# Altium PCB CH340N4T-R0.PcbDoc
Units mil, origin at the board's own origin, x right, y up, seen from the top; angles counter-clockwise.
Board outline 570 x 1109 mil, 2 copper layers (Top Layer, Bottom Layer); 12 components, 11 nets, 39 pads, 49 vias.
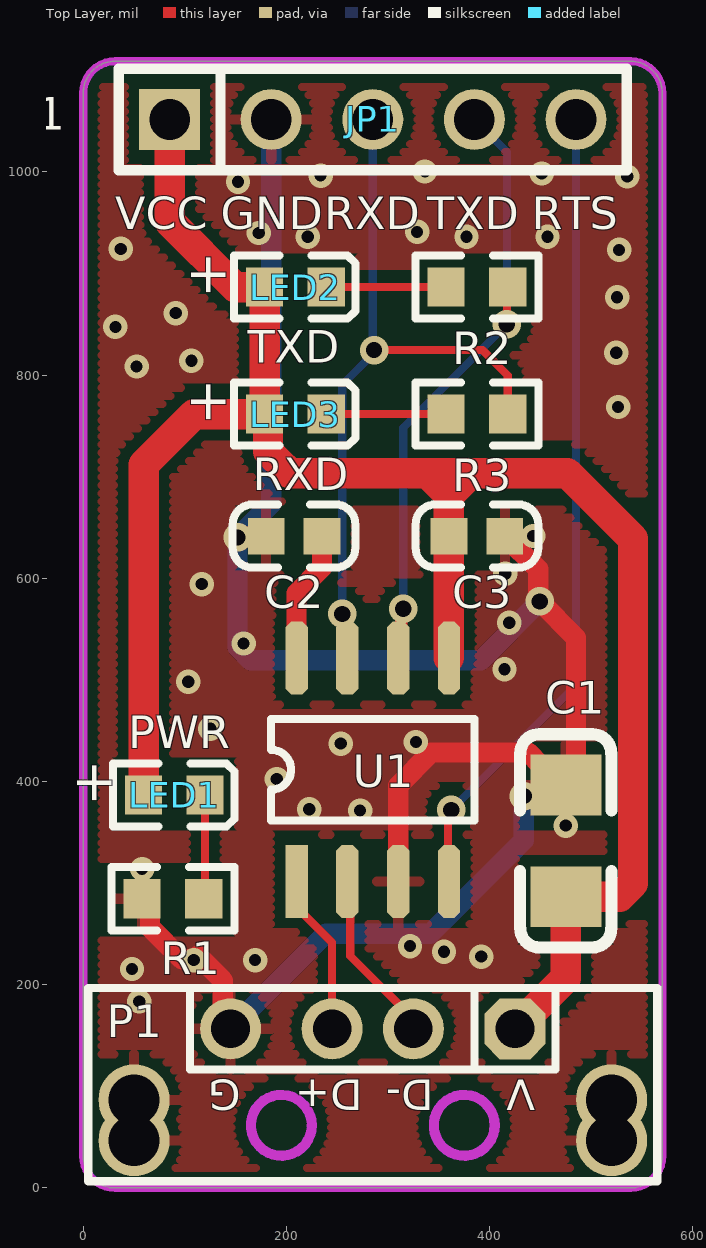
[diagram p0: Top Layer view]
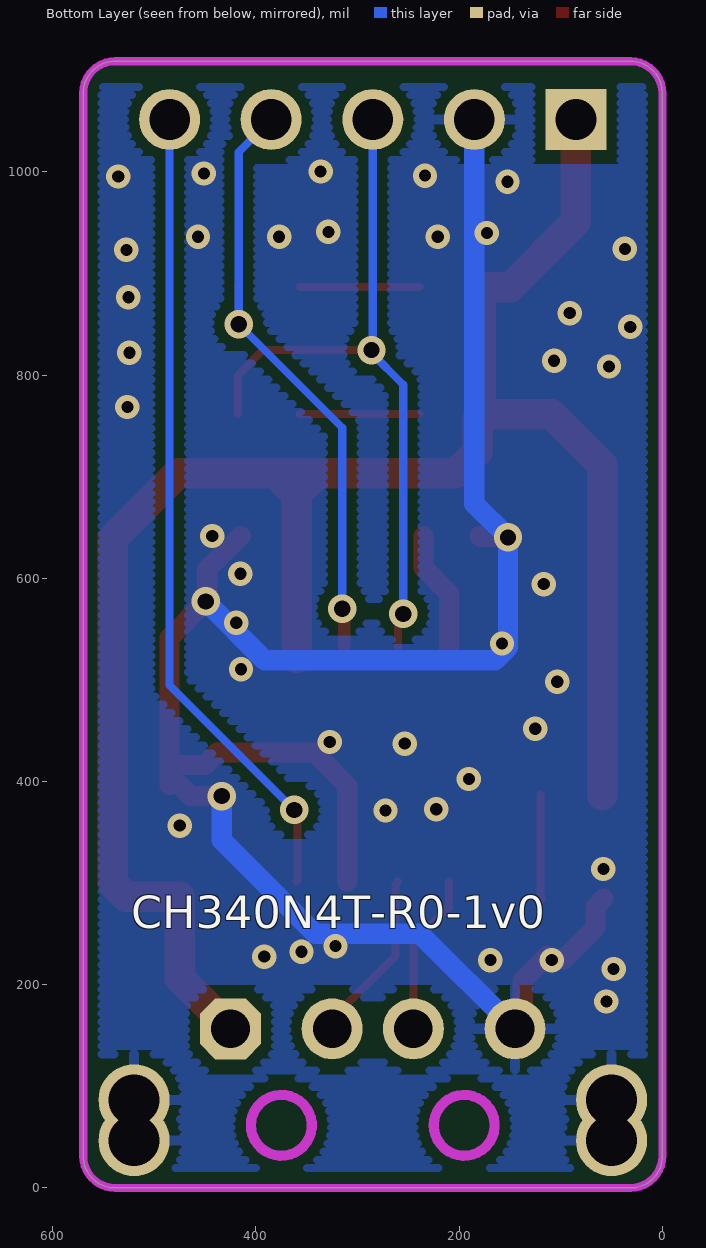
[diagram p1: Bottom Layer view, seen from below]

## Layer stack, top to bottom
Top Solder: solder mask 0.4, Solder Resist, Dk 3.5
Top Layer: signal copper 1.4
Dielectric 1: dielectric 12.6, FR-4, Dk 4.8
Bottom Layer: signal copper 1.4
Bottom Solder: solder mask 0.4, Solder Resist, Dk 3.5

## Board outline
0,31.5 ccw(c31.5,31.5) 31.5,0 538.5,0 ccw(c538.5,31.5) 570,31.5 570,1077.5 ccw(c538.5,1077.5) 538.5,1109 31.5,1109 ccw(c31.5,1077.5) 0,1077.5

## Design rules (kind name [scope] priority, off if disabled: settings)
Clearance Clearance_1 [InPolygon] p1: gap=10 ignorepadtopadclearanceinfootprint=FALSE
Clearance [All] p2: gap=6 ignorepadtopadclearanceinfootprint=FALSE
ComponentClearance [All] p1 off: gap=10 collisioncheckmode=3 verticalgap=10 showdistances=FALSE
DiffPairsRouting [All] p1: maxlimit=10 minlimit=7 mostfreqgap=8 toplayer_minwidth=6 toplayer_maxwidth=15 toplayer_prefwidth=8 bottomlayer_minwidth=6 bottomlayer_maxwidth=15 bottomlayer_prefwidth=8 maxuncoupledlength=500
MinimumSolderMaskSliver [All] p1 off: minsoldermaskwidth=10
PolygonConnect PolygonConnect_1 [IsVia] p1: connectstyle=Direct reliefconductorwidth=10 reliefentries=4 polygonreliefangle="90 Angle" airgapwidth=10
PolygonConnect [All] p2: connectstyle=Relief reliefconductorwidth=10 reliefentries=4 polygonreliefangle="90 Angle" airgapwidth=10
RoutingVias [All] p1: holewidth=16 width=28 viastyle="Through Hole" minholewidth=12 minwidth=24 maxholewidth=28 maxwidth=50
SilkToSilkClearance [All] p1 off: silktosilkclearance=10
SilkToSolderMaskClearance [IsPad] p1 off: minsilkscreentomaskgap=10 clearancetoexposedcopper=TRUE
SolderMaskExpansion [All] p1: expansion=4 istentingtop=FALSE
Width [All] p1: maxlimit=100 minlimit=6 preferedwidth=10
25 further rules are at their usual default settings.

## Classes and differential pairs
differential pair NewDifferentialPair1: +UD+ -UD-

## Components (designator, comment, footprint, x,y, rotation, side; value= is the part's Value field where it differs from the comment)
C1 "10uF" 3216_C 475,286.64 r270 top
C2 "0.1uF" 0603_C 235,641.64 r180 top
C3 "0.1uF" 0603_C 415,641.64 r180 top
JP1 "Header 5" SIP5-2.54mm 85,1051.64 r90 top
LED1 "PWR" 0603+ 59.37,386.64 r0 top
LED2 "TXD" 0603+ 178.57,886.64 r0 top
LED3 "RXD" 0603+ 178.57,761.64 r0 top
P1 "USB" USBAM 425,156.64 r180 top
R1 "2K" 0603 118.62,284.62 r180 top
R2 "2K" 0603 357.19,886.64 r0 top
R3 "2K" 0603 357.19,761.64 r0 top
U1 "CH340N" SOP8 210,301.64 r0 top

## Footprints (in the part's own frame and the unit in brackets; to place one, negate y for a bottom-side part, rotate by r counter-clockwise, add the part's x,y. Pads: shape width x height; smd on the part's side, far side on the other; paste and mask are expansions set on the pad)
0603 [mm]
  rect 0.93x0.98 smd: 1(0,0) 2(1.54,0)
  silkscreen extent -0.76,-0.79 2.3,0.79
0603+ [mm]
  rect 0.93x0.98 smd: 1(0,0) 2(1.54,0)
  silkscreen extent -0.76,-0.79 2.27,0.79
0603_C [mil]
  rect 36x36 smd: 1(0,0) 2(55,0)
  silkscreen extent -33,-31 88,31
3216_C [mil]
  rect 60x70 smd: 1(0,0) 2(-110,0)
  silkscreen extent -160,-45 50,45
SIP5-2.54mm [mil]
  rect 60x60 hole 40: 1(0,0)
  round 60 hole 40: 2(0,-100) 3(0,-200) 4(0,-300) 5(0,-400)
  silkscreen extent -50,-450 50,50
SOP8 [mil]
  rect 22x72 smd: 1(0,0)
  oct 22x72 smd: 2(50,0) 3(100,0) 4(150,0) 5(150,220) 6(100,220) 7(50,220) 8(0,220)
  silkscreen extent -25,60 175,160
USBAM [mil]
  round 70 hole 50: 0(-95,70) 0(-95,110) 0(375,70) 0(375,110)
  oct 60x60 hole 38: 1(0,0)
  round 60 hole 38: 2(100,0) 3(180,0) 4(280,0)
  Keep-Out Layer circle w10: c50,95 r30
  Keep-Out Layer circle w10: c230,95 r30
  silkscreen extent -140,-40 420,150

## Part data
C1 C2 C3: library part CAP, "Capacitor"
JP1: "Header, 5-Pin"
LED1: library part LED2, "Typical RED, GREEN, YELLOW, AMBER GaAs LED", PackageDocument=Feb-2002
LED2 LED3: library part LED2, "Typical RED, GREEN, YELLOW, AMBER GaAs LED"
R1 R2 R3: library part Res2, "Resistor"
U1: "USB to TTL Serial / UART"

## Via types
v1: diameter 24, hole 12, Top Layer to Bottom Layer, tented both sides, 41 vias
v2: diameter 28, hole 16, Top Layer to Bottom Layer, tented both sides, 8 vias

## Nets (pads, with @x,y where several pads share a name; then routed paths per layer and width w, separated by ;. In a path a pad name is that pad's centre, name@x,y a point inside that pad or via, vN(x,y) a via of type N, cw(c..) or ccw(c..) an arc to the next point about the centre after c; other vN are vias at no path point)
GND: C1.2 C2.2 C3.1 JP1.2 P1.0 P1.4 R1.2 U1.3 | length 2081.8
  Top Layer w20: R1.2 65.73,276.88 65.73,256.47 97.18,225.02 108.11,225.02 v1(108.87,224.25) ; v1@113.12,228.5 137.35,204.28 137.35,164.3 P1.4 ; v2(151.91,640.3) 152.59,640.97 179.33,640.97 C2.2 ; U1.3 310,396.06 342.57,428.64 438.01,428.64 450.39,416.25 C1.2@485,416.25 ; C3.1 447.82,608.82 447.82,578.82 v2(449.35,577.29) 485,541.64 C1.2@485,416.25 ; v2(433.63,385.72) 464.08,385.72 C1.2 ; C1.2@485,396.64 C1.2@485,416.25
  Bottom Layer w20: P1.4 238.65,250.29 341.53,250.29 433.63,342.39 v2(433.63,385.72) ; v2(151.91,640.3) 185,673.38 JP1.2 ; v2@151.91,643.99 151.91,532.26 164.65,519.52 391.58,519.52 v2(449.35,577.29)
  other v1: 55.06,183.48 47.99,215.56 169.21,224.25 391.79,227.76 355.15,232.48 321.67,238.06 57.99,313.91 475,356.64 272.5,371.57 222.49,372.66 190.41,402.56 253.47,437.35 327.4,438.98 125.18,452.02 103.44,498.23 414.68,510.56 157.84,535.92 419.34,556.25 116.63,594.38 415.34,604.61 443,641.64 526.49,768.65 52.55,808.56 106.52,814.18 524.55,822.15 31.67,847.5 91.17,861.04 525.52,876.62 527.46,923.31 36.87,924.31 220.98,936.28 377.22,936.28 456.97,936.28 172.72,939.96 328.66,941.05 152.4,990.3 535.5,995.58 233.66,996.4 451.25,998.45 336.32,1000.49
NetC2_1: C2.1 U1.8 | length 130.4
  Top Layer w20: U1.8 210,585.35 235,610.35 C2.1
NetLED1_2: LED1.2 R1.1 | length 102.6
  Top Layer w8: R1.1 120,285.99 LED1.2
NetLED2_2: LED2.2 R2.1 | length 118
  Top Layer w8: LED2.2 R2.1
NetLED3_2: LED3.2 R3.1 | length 118
  Top Layer w8: LED3.2 R3.1
RTS: JP1.5 U1.4 | length 802.4
  Top Layer w8: U1.4 359.21,302.43 359.21,369.04 v2(362.28,372.1)
  Bottom Layer w8: v2(362.28,372.1) 485,494.83 JP1.5
RXD: JP1.3 R3.2 U1.7 | length 731
  Top Layer w8: v2(255,565) v2@258.18,565 ; U1.7 v2@260,563.18 ; v2(286.25,824.73) 392.94,824.73 417.82,799.84 R3.2 ; v2@258.18,565 260,565 v2@260,563.18 ; v2@258.18,565 v2@260,563.18
  Bottom Layer w8: v2(255,565) 255,790.52 286.17,821.69 286.17,830.88 285,832.06 JP1.3
TXD: JP1.4 R2.2 U1.6 | length 677.7
  Top Layer w8: v2(416.96,850.16) 416.96,885.78 R2.2 ; U1.6 315,521.64 v2(315,570) 310.72,565.72 310.72,522.37 U1.6
  Bottom Layer w8: v2(315,570) 315,748.2 v2(416.96,850.16) 416.96,1019.68 JP1.4
UD+: P1.3 U1.1 | length 159.5
  Top Layer w8: U1.1 210,276.64 217,269.64 245,241.64 P1.3
UD-: P1.2 U1.2 | length 171.9
  Top Layer w8: U1.2 262.81,298.83 262.81,228.46 325,166.27 P1.2
VCC: C1.1 C3.2 JP1.1 LED1.1 LED2.1 LED3.1 P1.1 U1.5 | length 2046
  Top Layer w30: LED1.1 59.37,711.92 109.1,761.64 LED3.1 ; JP1.1 85,951.2 149.55,886.64 LED2.1 LED3.1 ; 339.2,702.9 359.77,682.34 ; U1.5 C3.2 359.77,641.88 359.77,682.34 ; 360.54,682.53 381.63,703.62 ; P1.1 475,206.64 C1.1 475.21,286.85 527.94,286.85 541.12,300.04 541.12,638.98 476.48,703.62 381.63,703.62 ; LED3.1 181.88,758.34 181.88,725.05 190.03,716.89 203.3,703.62 339.2,703.62 359.77,703.62 ; 359.77,682.34 359.77,703.62 ; 359.77,703.62 381.63,703.62

## Polygon pours and split planes (outlines as drawn)
GND on Bottom Layer "GND_L" (hatched Horizontal grid 8 track 8, remove dead copper, pour order 0): -2.28,1111.34 -2.28,-0.45 575.93,-0.45 575.93,1109.4
GND on Top Layer "GND_L" (hatched Horizontal grid 8 track 8, remove dead copper, pour order 1): -4.22,1113.28 -4.22,1.49 581.75,1.49 581.75,1111.34

## Keep-outs
Keep-Out Layer:
  lines w8: 31.5,0 cw(c31.5,31.5) 0,31.5 0,1077.5 cw(c31.5,1077.5) 31.5,1109 538.5,1109 cw(c538.5,1077.5) 570,1077.5 570,31.5 cw(c538.5,31.5) 538.5,0 ; 31.5,0 538.5,0 ; 31.5,0 538.5,0

## Silkscreen, mask and mechanical layers (free items; w line width, h text height)
Top Overlay:
  text "VCC" at 31.59,943.73 h32
  text "GND" at 135.44,943.73 h32
  text "RXD" at 237.37,943.73 h32
  text "TXD" at 338.52,943.73 h32
  text "RTS" at 441.29,943.73 h32
Bottom Overlay:
  text "CH340N4T-R0-1v0" at 522.93,255.38 h32
Mechanical 1:
  the board outline again, w8

## Text inside footprints (layer, text, board x,y; h text height)
LED1: Top Overlay "+" at 28.03,375.73 h40 r90
LED2: Top Overlay "+" at 140.5,875.66 h40 r90
LED3: Top Overlay "+" at 140.5,750.66 h40 r90
P1: Top Overlay "D-" at 345,106.64 h30 r180; Top Overlay "D+" at 275,106.64 h30 r180; Top Overlay "V" at 445,106.64 h30 r180; Top Overlay "G" at 155,106.64 h30 r180